# Altium PCB Chargeur_nucleo.PcbDoc
Units mm, origin at the board's own origin, x right, y up, seen from the top; angles counter-clockwise.
Board outline 95 x 80 mm, 2 copper layers (Top Layer, Bottom Layer); 18 components, 10 nets, 118 pads, 2 vias.
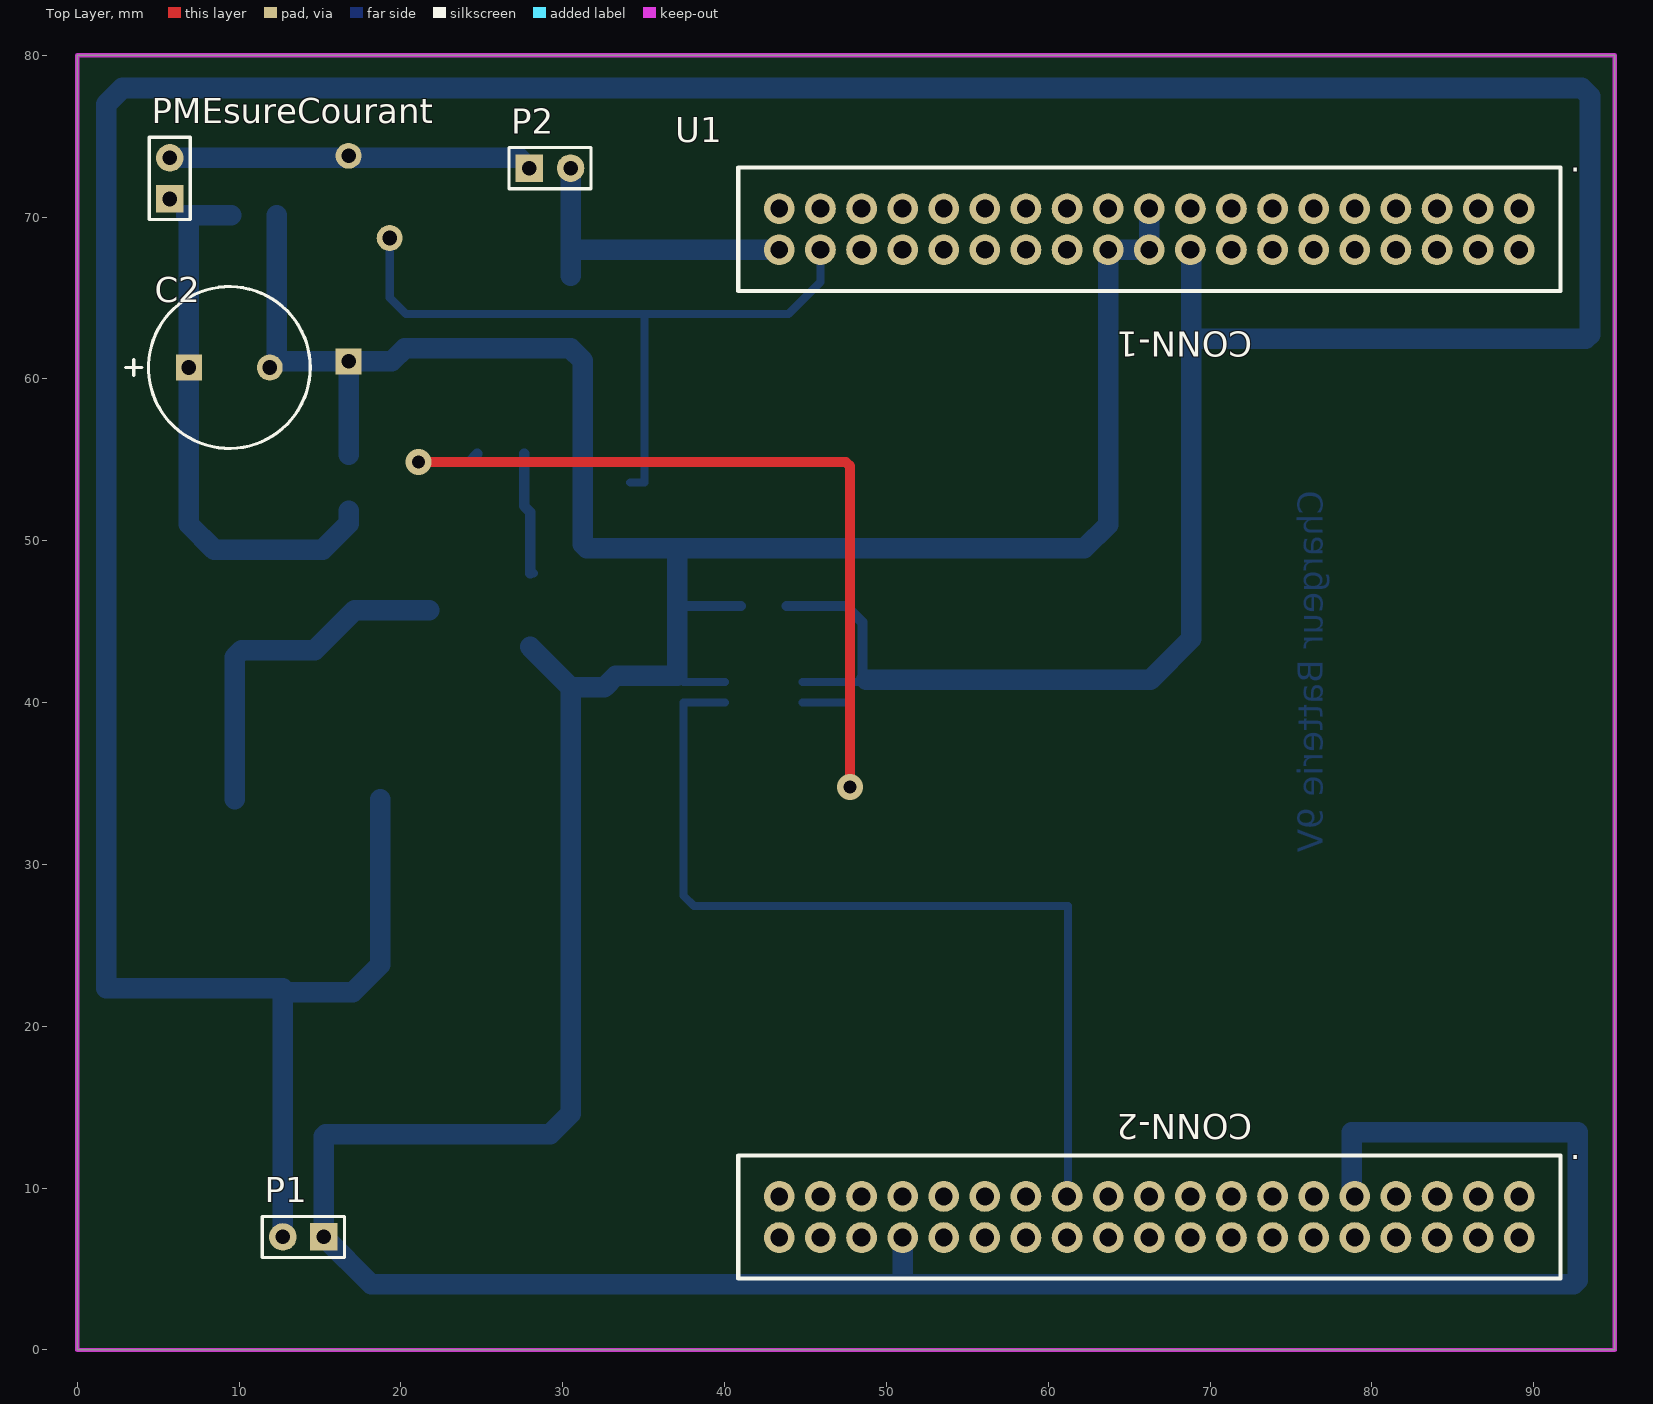
[diagram p0: Top Layer view]
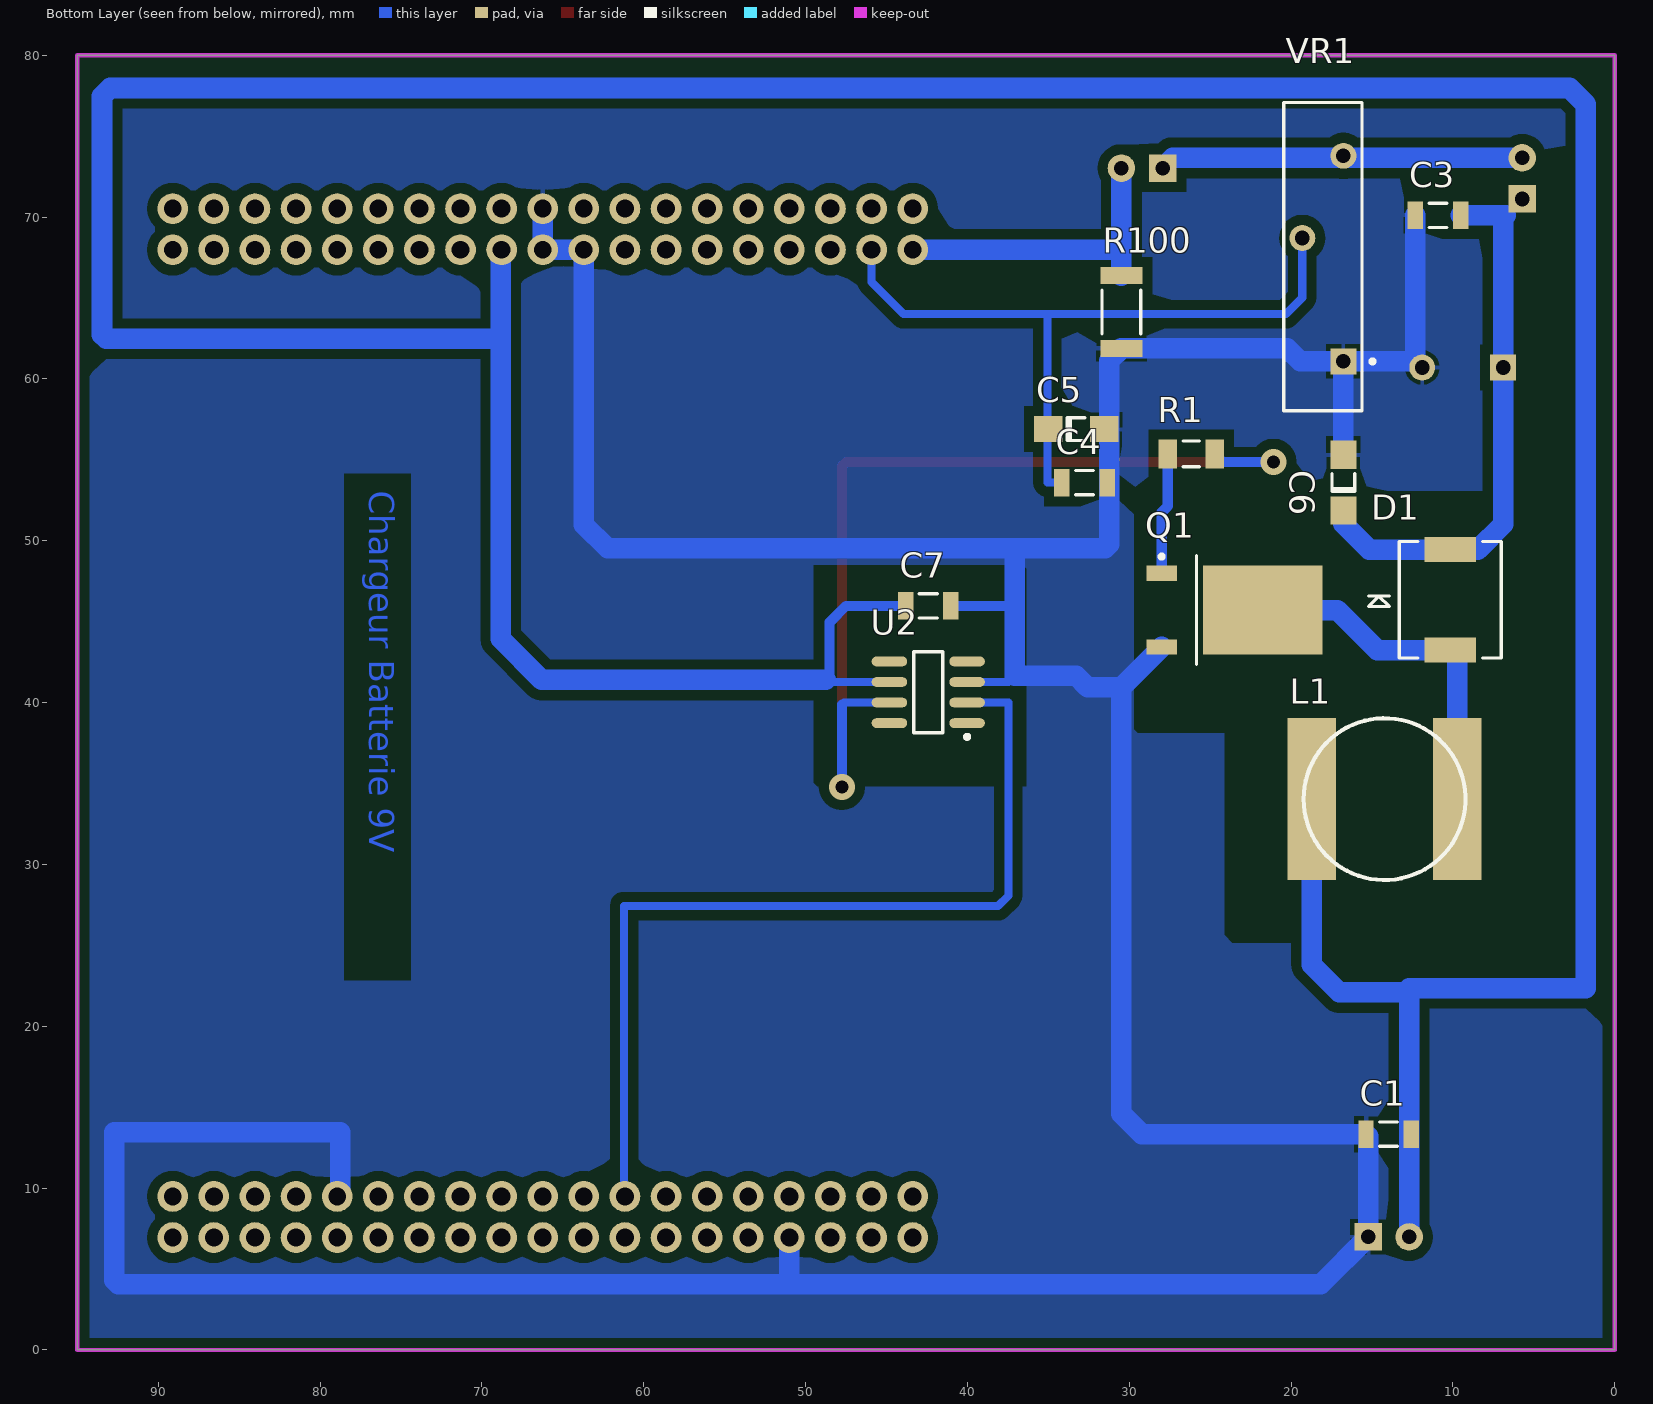
[diagram p1: Bottom Layer view, seen from below]

## Layer stack, top to bottom
Top Solder: solder mask 0.0102, Solder Resist, Dk 3.5
Top Layer: signal copper 0.0356
Dielectric 1: dielectric 0.32, FR-4, Dk 4.8
Bottom Layer: signal copper 0.0356
Bottom Solder: solder mask 0.0102, Solder Resist, Dk 3.5

## Board outline
0,0 95,0 95,80 0,80

## Design rules (kind name [scope] priority, off if disabled: settings)
Clearance Clearance_1 [IsRegion] p1: gap=0.635
Clearance [All] p2: gap=0.254
PolygonConnect [All] p1: connectstyle=Relief reliefconductorwidth=0.254 reliefentries=4 polygonreliefangle="90 Angle" airgapwidth=0.254
RoutingVias [All] p1: holewidth=0.711 width=1.27 viastyle="Through Hole" minholewidth=0.711 minwidth=1.27 maxholewidth=0.711 maxwidth=1.27
SolderMaskExpansion [All] p1: expansion=0.102
UnpouredPolygon [All] p1: allowunpoured=FALSE
Width [All] p1: maxlimit=1.27 minlimit=0.254 preferedwidth=0.635
29 further rules are at their usual default settings.

## Components (designator, comment, footprint, x,y, rotation, side; value= is the part's Value field where it differs from the comment)
C1 "CAP 100nF 25V 1206(3216)" CAPC1206(3216)100_L 13.97,13.335 r180 bottom
C2 "EEU-EE2G100" PNSC-EEU-EE2G100-2_V 9.395,60.706 r0 top
C3 "CAP 100nF 25V 1206(3216)" CAPC1206(3216)100_L 10.922,70.104 r180 bottom
C4 "CAP 100nF 25V 1206(3216)" CAPC1206(3216)100_L 32.766,53.594 r0 bottom
C5 "CC475B004M" B 33.274,56.896 r180 bottom
C6 "CC475B004M" B 16.764,53.594 r90 bottom
C7 "CAP 100nF 25V 1206(3216)" CAPC1206(3216)100_L 42.418,45.974 r0 bottom
D1 "SSC53L" VISH-DO-214AB-2_V 10.16,46.355 r90 bottom
L1 "Inductor" Inductor_10x10 14.224,34.036 r0 bottom
P1 "Header 2" HDR1X2 15.24,6.985 r180 top
P2 "Header 2" HDR1X2 27.94,73.025 r0 top
PMEsureCourant "Header 2" HDR1X2 5.715,71.12 r90 top
Q1 "FDD5690" TO-252AA_N 23.495,45.72 r180 bottom
R1 "470R 5% 1206(3216)" RESC1206(3216)_N 26.162,55.372 r180 bottom
R100 "0.25 Ohm" RESC2010(5025)_L 30.48,64.135 r90 bottom
U1 "Nucleo-F103RB" NUCLEO--F103RB 69.85,38.735 r270 top locked
U2 "TC4424AVOA713" SOIC-OA8_N 42.418,40.64 r0 bottom
VR1 "3006P-1-203ZLF" BOUR-3006P-3_V 18.034,67.564 r90 bottom

## Footprints (in the part's own frame and the unit in brackets; to place one, negate y for a bottom-side part, rotate by r counter-clockwise, add the part's x,y. Pads: shape width x height; smd on the part's side, far side on the other; paste and mask are expansions set on the pad)
B [mm] "Chip Capacitor; Body 3.81 x 1.27 mm (LxW typ)"
  rect 1.75x1.6 smd: 1(-1.725,0) 2(1.725,0)
  silkscreen extent -0.55,-0.7 0.55,0.7
BOUR-3006P-3_V [mm] "THD, 3-Leads, Body 19.05x4.83mm, Height 6.6mm"
  rect 1.6x1.6 hole 0.9: 1(-6.475,-1.27)
  round 1.6 hole 0.9: 2(1.145,1.27) 3(6.225,-1.27)
  silkscreen extent -9.53,-3.19 9.53,2.41, body extent -9.53,-2.41 11.05,2.41, height 6.6
CAPC1206(3216)100_L [mm] "Chip Capacitor, Body 3.2x1.6mm, Height 1mm, IPC High Density"
  rect 0.95x1.7 smd: 1(-1.4,0) 2(1.4,0)
  silkscreen extent -0.55,-0.75 0.55,0.75, body extent -1.7,-0.9 1.7,0.9, height 1
HDR1X2 [mm] "Connector; Header; 2 Position"
  rect 1.7x1.7 hole 0.9: 1(0,0)
  round 1.7 hole 0.9: 2(2.54,0)
  silkscreen extent -1.27,-1.27 3.81,1.27
Inductor_10x10 [mm]
  rect 3x10 smd: 1(4.5,0) 2(-4.5,0)
  silkscreen extent -5,-5 5,5
NUCLEO--F103RB [mm]
  round 1.9 hole 1.1: 1.1(-31.79,19.25) 1.2(-29.25,19.25) 1.3(-31.79,16.71) 1.4(-29.25,16.71) 1.5(-31.79,14.17) 1.6(-29.25,14.17) 1.7(-31.79,11.63) 1.8(-29.25,11.63) 1.9(-31.79,9.09) 1.10(-29.25,9.09) 1.11(-31.79,6.55) 1.12(-29.25,6.55) 1.13(-31.79,4.01) 1.14(-29.25,4.01) 1.15(-31.79,1.47) 1.16(-29.25,1.47) 1.17(-31.79,-1.07) 1.18(-29.25,-1.07) 1.19(-31.79,-3.61) 1.20(-29.25,-3.61) 1.21(-31.79,-6.15) 1.22(-29.25,-6.15) 1.23(-31.79,-8.69) 1.24(-29.25,-8.69) 1.25(-31.79,-11.23) 1.26(-29.25,-11.23) 1.27(-31.79,-13.77) 1.28(-29.25,-13.77) 1.29(-31.79,-16.31) 1.30(-29.25,-16.31) 1.31(-31.79,-18.85) 1.32(-29.25,-18.85) 1.33(-31.79,-21.39) 1.34(-29.25,-21.39) 1.35(-31.79,-23.93) 1.36(-29.25,-23.93) 1.37(-31.79,-26.47) 1.38(-29.25,-26.47) 2.1(29.25,19.25) 2.2(31.79,19.25) 2.3(29.25,16.71) 2.4(31.79,16.71) 2.5(29.25,14.17) 2.6(31.79,14.17) 2.7(29.25,11.63) 2.8(31.79,11.63) 2.9(29.25,9.09) 2.10(31.79,9.09) 2.11(29.25,6.55) 2.12(31.79,6.55) 2.13(29.25,4.01) 2.14(31.79,4.01) 2.15(29.25,1.47) 2.16(31.79,1.47) 2.17(29.25,-1.07) 2.18(31.79,-1.07) 2.19(29.25,-3.61) 2.20(31.79,-3.61) 2.21(29.25,-6.15) 2.22(31.79,-6.15) 2.23(29.25,-8.69) 2.24(31.79,-8.69) 2.25(29.25,-11.23) 2.26(31.79,-11.23) 2.27(29.25,-13.77) 2.28(31.79,-13.77) 2.29(29.25,-16.31) 2.30(31.79,-16.31) 2.31(29.25,-18.85) 2.32(31.79,-18.85) 2.33(29.25,-21.39) 2.34(31.79,-21.39) 2.35(29.25,-23.93) 2.36(31.79,-23.93) 2.37(29.25,-26.47) 2.38(31.79,-26.47)
  Mechanical 13 keep-out region: 30,43.999 33,43.999 33,49.999 30,49.999
  Mechanical 13 keep-out region: -33,44 -30,44 -30,50 -33,50
  silkscreen extent -34.33,-29.01 34.33,21.79
PNSC-EEU-EE2G100-2_V [mm] "Through-hole, 2-Leads, Base 10x10mm, Height 22mm"
  rect 1.6x1.6 hole 0.9: 1(-2.5,0)
  round 1.6 hole 0.9: 2(2.5,0)
  silkscreen extent -6.4,-5 5,5, body extent -5.01,-5.01 5.01,5.01, height 22
RESC1206(3216)_N [mm] "Chip Resistor, Body 3.2x1.6mm, IPC Medium Density"
  rect 1.15x1.8 smd: 1(-1.45,0) 2(1.45,0)
  silkscreen extent -0.5,-0.8 0.5,0.8, body extent -1.67,-0.87 1.67,0.87, height 0.75
RESC2010(5025)_L [mm] "Chip Resistor, Body 5.0x2.5mm, IPC High Density"
  rect 1.05x2.6 smd: 1(-2.25,0) 2(2.25,0)
  silkscreen extent -1.35,-1.2 1.35,1.2, body extent -2.6,-1.35 2.6,1.35, height 0.71
SOIC-OA8_N [mm] "SOIC, 8-Leads, Body 4.9x3.9mm, Pitch 1.27mm, IPC Medium Density"
  oval 2.2x0.6 smd: 1(-2.4,1.905) 2(-2.4,0.635) 3(-2.4,-0.635) 4(-2.4,-1.905) 5(2.4,-1.905) 6(2.4,-0.635) 7(2.4,0.635) 8(2.4,1.905)
  silkscreen extent -2.52,-2.5 0.9,2.88, body extent -2,-2.5 2,2.5, height 1.75
TO-252AA_N [mm] "D-PAK, 4-Leads, Body 6.1x6.5mm, Pitch 2.28mm, Lead Span 9.9mm, IPC Medium Density"
  rect 1.9x0.95 smd: 1(-4.5,2.28) 3(-4.5,-2.28)
  rect 7.4x5.5 smd: 4(1.75,0)
  silkscreen extent -4.62,-3.35 -2.35,3.43, body extent -2.25,-3.37 4.1,3.37, height 2.38
VISH-DO-214AB-2_V [mm] "Molded Diode, 2-Leads, Body 7.11x6.22mm"
  rect 1.52x3.2 smd: 1(-3.105,0) 2(3.105,0)
  silkscreen extent -3.6,-3.15 3.6,5.04, body extent -3.77,-3.11 3.78,3.11, height 2.62

## Part data
C1 C3 C4 C7: library part CMP-1037-04193-1, "CAP 100nF 25V ±10% 1206 (3216 Metric) Thickness 1mm SMD"
C2: library part CMP-0736-00002-1, "Aluminum Electrolytic Capacitor, 10 uF +/- 20%, 400 V, -25 to 105 degC, 2-Pin 10 x 10 x 22 mm Through-hole, RoHS, Tape and Reel"
C5 C6: "Conformal Coated Solid Tantalum Chip Capacitor: Standard Range, 4.7uF, 20% Tolerance, 4 WVDC @ -55°C to +85°C, Surge = 5V"
D1: library part CMP-1666-00013-4, "High Voltage Surface Mount Schottky Rectifier, 3 A, -65 to 175 degC, 2-Pin SMD, RoHS, Tape and Reel"
P1 P2 PMEsureCourant: "Header, 2-Pin"
Q1: library part IRFR13N20D, "HEXFET Power MOSFET"
R1: library part CMP-1014-00066-1, "470R 0.25W 5% 1206 (3216 Metric)  SMD"
R100: library part CMP-1017-00002-1, "1R 0.75W 5% 2010 (5025 Metric)  SMD"
U2: "3A Dual High-Speed Power MOSFET Drivers, Non Inverting, Extended Temperature, Tape and Reel"
VR1: library part CMP-0972-00011-1, "Trimming Potentiometer, 20K Ohm +/- 10%, -55 to 125 degC, 3-Pin 19.05 x 4.83 x 6.6 mm THD, RoHS"

## Via types
v1: diameter 1.6, hole 0.8, Top Layer to Bottom Layer, 2 vias

## Nets (pads, with @x,y where several pads share a name; then routed paths per layer and width w, separated by ;. In a path a pad name is that pad's centre, name@x,y a point inside that pad or via, vN(x,y) a via of type N, cw(c..) or ccw(c..) an arc to the next point about the centre after c; other vN are vias at no path point)
5V: C1.2 C7.2 L1.1 P1.2 U1.1.18 U2.6 | length 288.4
  Bottom Layer w0.305: U1.1.18 U1.1.18@68.78,68.713
  Bottom Layer w0.406: 48.514,41.402 48.768,41.402
  Bottom Layer w0.508: U2.6 48.387,41.275 48.514,41.402
  Bottom Layer w0.635: C7.2 47.498,45.974 48.514,44.958 48.514,41.402
  Bottom Layer w1.27: P1.2 12.7,22.352 ; L1.1 18.724,23.804 17.018,22.098 12.954,22.098 12.7,22.352 ; 48.768,41.402 66.294,41.402 68.834,43.942 68.834,62.484 ; U1.1.18 68.834,67.931 68.834,62.484 ; 12.7,22.352 1.778,22.352 1.778,76.962 2.794,77.978 92.964,77.978 93.472,77.47 93.472,62.738 93.218,62.484 68.834,62.484
CMD_MOS: U1.2.23 U2.2 | length 56.5
  Bottom Layer w0.508: U2.2 37.465,40.005 37.465,28.067 38.1,27.432 61.214,27.432 61.214,9.539 U1.2.23
GND: C1.1 C2.2 C3.1 C4.1 C5.2 C6.2 C7.1 P1.1 Q1.3 R100.1 U1.1.19 U1.1.20 U1.1.22 U1.2.9 U1.2.32 U2.3 VR1.1 | length 284.3
  Bottom Layer w0.508: 37.084,41.656 37.465,41.275 U2.3
  Bottom Layer w0.635: 37.084,45.72 37.338,45.974 C7.1 ; U1.1.19 U1.1.19@66.294,70.579
  Bottom Layer w1.27: C2.2 C2.2@12.278,61.089 ; C3.1 12.322,61.133 C2.2@12.278,61.089 ; C6.2 VR1.1 ; Q1.3 30.48,40.955 ; 51,4.264 50.8,4.064 18.161,4.064 P1.1 15.24,13.205 C1.1 29.21,13.335 30.48,14.605 30.48,40.955 ; U1.2.32 51,4.064 92.456,4.064 92.71,4.318 92.71,13.462 78.74,13.462 78.74,9.685 U1.2.9 ; U1.1.19 U1.1.20 U1.1.22 63.7,51 62.23,49.53 37.084,49.53 ; C2.2@12.278,61.089 VR1.1 ; VR1.1 19.433,61.089 20.229,61.885 R100.1 31.245,61.12 31.245,49.781 31.496,49.53 37.084,49.53 ; 30.48,40.955 32.573,40.955 33.274,41.656 37.084,41.656 37.084,45.72 37.084,49.53
MES_COURANT: P2.2 R100.2 U1.1.38 | length 19.6
  Bottom Layer w1.27: R100.2 30.48,67.818 ; P2.2 30.48,67.818 ; U1.1.38 30.647,67.985 30.48,67.818
MES_TENSION: C4.2 C5.1 U1.1.36 VR1.2 | length 44.8
  Bottom Layer w0.508: VR1.2 19.304,65.024 20.32,64.008 35.052,64.008 ; C4.2 35.052,53.594 35.052,64.008 ; U1.1.36 45.92,65.986 43.942,64.008 35.052,64.008
NetC2_1: C2.1 C3.2 C6.1 D1.2 PMEsureCourant.1 | length 33.9
  Bottom Layer w1.27: C3.2 6.731,70.104 6.895,69.94 C2.1 6.895,51.017 8.452,49.46 D1.2 15.17,49.46 16.764,51.054 C6.1
NetD1_1: D1.1 L1.2 Q1.4 | length 22
  Bottom Layer w1.27: L1.2 9.724,42.814 D1.1 14.675,43.25 17.145,45.72 Q1.4
NetP2_1: P2.1 PMEsureCourant.2 VR1.3 | length 22.5
  Bottom Layer w1.27: PMEsureCourant.2 27.305,73.66 P2.1
NetQ1_1: Q1.1 R1.1 | length 7.7
  Bottom Layer w0.508: Q1.1 Q1.1@28.2,48
  Bottom Layer w0.635: R1.1 27.612,52.144 27.995,51.761 Q1.1
NetR1_2: R1.2 U2.7 | length 58.5
  Top Layer w0.635: v1(21.082,54.864) 47.498,54.864 47.752,54.61 v1(47.752,34.798)
  Bottom Layer w0.508: U2.7 47.625,40.005 47.752,39.878
  Bottom Layer w0.635: v1(21.082,54.864) 24.204,54.864 R1.2 ; v1(47.752,34.798) 47.752,39.878
pads on no net: U1.1.1 U1.1.2 U1.1.3 U1.1.4 U1.1.5 U1.1.6 U1.1.7 U1.1.8 U1.1.9 U1.1.10 U1.1.11 U1.1.12 U1.1.13 U1.1.14 U1.1.15 U1.1.16 U1.1.17 U1.1.21 U1.1.23 U1.1.24 U1.1.25 U1.1.26 U1.1.27 U1.1.28 U1.1.29 U1.1.30 U1.1.31 U1.1.32 U1.1.33 U1.1.34 U1.1.35 U1.1.37 U1.2.1 U1.2.2 U1.2.3 U1.2.4 U1.2.5 U1.2.6 U1.2.7 U1.2.8 U1.2.10 U1.2.11 U1.2.12 U1.2.13 U1.2.14 U1.2.15 U1.2.16 U1.2.17 U1.2.18 U1.2.19 U1.2.20 U1.2.21 U1.2.22 U1.2.24 U1.2.25 U1.2.26 U1.2.27 U1.2.28 U1.2.29 U1.2.30 U1.2.31 U1.2.33 U1.2.34 U1.2.35 U1.2.36 U1.2.37 U1.2.38 U2.1 U2.4 U2.5 U2.8

## Polygon pours and split planes (outlines as drawn)
GND on Bottom Layer "Bot Overlay-GND" (solid, remove dead copper, pour order 2): 0,80 95,80 95,0.508 94.492,0 0,0

## Keep-outs
Keep-Out Layer:
  the board outline again, w0.254

## Other copper
Bottom Layer:
  pour cut-out: 36.322,48.26 36.576,48.514 49.53,48.514 49.53,35.052 49.276,34.798 36.322,34.798
  pour cut-out: 4.318,53.34 4.572,53.086 29.718,53.086 29.718,38.354 29.464,38.1 24.13,38.1 24.13,25.654 23.622,25.146 4.318,25.146
  text "Chargeur Batterie 9V" at 76.962,53.086 h1.52 r90

## Text inside footprints (layer, text, board x,y; h text height)
U1: Top Overlay "CONN-1" at 72.59,62.905 h1.52 r180; Top Overlay "CONN-2" at 72.59,14.565 h1.52 r180